# EAGLE board BNSK-Rambo-Converters-Device (EAGLE 9.6.2)

Size 68 x 58 mm. Coordinates in mm from the lower left corner, seen from the top.
Outline: 0,4 0,54 arc-90 4,58 64,58 arc-90 68,54 68,4 arc-90 64,0 4,0 arc-90 0,4
Copper layers (1*16): Top 0.035mm / dielectric 1.5mm / Bottom 0.035mm
Design rules "default": minimum track width 10mil, minimum drill 24mil, track to track 8mil, track to pad 8mil, pad to pad 8mil, via to via 8mil, smd to smd 8mil, copper to edge 40mil, drill to drill 8mil, minimum pad ring 10mil, minimum via ring 8mil, stop-mask expansion 4mil, vias tented up to drill 0mil, thermal gap 10mil

## Footprints (pad centres in the part's own frame; a part is rotated, then mirrored left to right if it is on the bottom)
B3F-10XX = drill 1.016 long: 1 -3.251,2.261; 2 3.251,2.261; 3 -3.251,-2.261; 4 3.251,-2.261
1206 = smd 1.6 x 1.803: A -1.422,0; C 1.422,0
1X07 = drill 1.016 long: 1 -7.62,0; 2 -5.08,0; 3 -2.54,0; 4 0,0; 5 2.54,0; 6 5.08,0; 7 7.62,0
1X09-BIG = drill 1.016 pad 1.778 octagon: 1 -10.16,0; 2 -7.62,0; 3 -5.08,0; 4 -2.54,0; 5 0,0; 6 2.54,0; 7 5.08,0; 8 7.62,0; 9 10.16,0

## Placement (x,y rotation side)
CHECK_NOW  [B3F-10XX]  32.4,11.27 180 top
CHECKING  [1206]  23,11 180 top
FAILED  [1206]  36.25,38.84 180 top
MCU_LEFT_SIDE  [1X07]  54,23 0 top
MCU_RIGHT_SIDE  [1X07]  54,38 180 top
PASSED  [1206]  36.25,21.62 180 top
POWER  [1206]  58.71,11.71 180 top
R_ARRAY_8  [1X09-BIG]  3.81,30.56 270 top
RUNNING  [1206]  21,30.44 180 top

## Library data of the parts
CHECK_NOW = switch-omron; MPN: B3F-1000; OC_FARNELL: 176432; OC_NEWARK: 36M3542
CHECKING FAILED PASSED POWER R_ARRAY_8 RUNNING = adafruit
MCU_LEFT_SIDE MCU_RIGHT_SIDE = pinhead

## Nets
GND: MCU_LEFT_SIDE.6 R_ARRAY_8.1
MCU_D0: MCU_RIGHT_SIDE.1 PASSED.A
MCU_D1: FAILED.A MCU_RIGHT_SIDE.2
MCU_D2: MCU_RIGHT_SIDE.3 RUNNING.A
MCU_D3: CHECK_NOW.1 MCU_RIGHT_SIDE.4
MCU_D4: CHECKING.A MCU_RIGHT_SIDE.5
MCU_D5: MCU_RIGHT_SIDE.6
MCU_D6: MCU_RIGHT_SIDE.7
MCU_D7: MCU_LEFT_SIDE.1
MCU_D8: MCU_LEFT_SIDE.2
MCU_D9: MCU_LEFT_SIDE.3
MCU_D10: MCU_LEFT_SIDE.4
MCU_VCC_5V: MCU_LEFT_SIDE.7
RA_1: POWER.C R_ARRAY_8.2
RA_2: PASSED.C R_ARRAY_8.3
RA_3: FAILED.C R_ARRAY_8.4
RA_4: R_ARRAY_8.5 RUNNING.C
RA_5: CHECK_NOW.4 R_ARRAY_8.6
RA_6: CHECKING.C R_ARRAY_8.7
VCC_33: MCU_LEFT_SIDE.5 POWER.A

## Tracks (layer width: path | path; a pad name or v marks a point on that pad's centre or on a via)
GND  (1 unrouted)
MCU_D0  (1 unrouted)
MCU_D1  (1 unrouted)
MCU_D2  (1 unrouted)
MCU_D3  (1 unrouted)
MCU_D4  (1 unrouted)
RA_1  (1 unrouted)
RA_2  (1 unrouted)
RA_3  (1 unrouted)
RA_4  (1 unrouted)
RA_5  (1 unrouted)
RA_6  (1 unrouted)
VCC_33  (1 unrouted)

## Text on the board
tNames: RAMBO | Converters Automation Device | GND | + | D4 | D3 | D2 | D1 | D0 | + | + | 3V | GND | + | + | BNSK 2023/01 | C:/DVT/Fred.PCB/EXTENSIONS/BNSK-Rambo-Converters-Device/Rambo.BW.bmp | C:/DVT/Fred.PCB/EXTENSIONS/BNSK-Rambo-Converters-Device/Title.Converters Automation Device.bmp | C:/DVT/Fred.PCB/EXTENSIONS/BNSK-Rambo-Converters-Device/Title.RAMBO.bmp | C:/DVT/Fred.PCB/EXTENSIONS/BNSK-Rambo-Converters-Device/Title.bmp
bNames: www.FredericTorres.com | PCBv1 - 2023.1